# Altium PCB FS872.pcbdoc
Units mil, origin at the board's own origin, x right, y up, seen from the top; angles counter-clockwise.
Board outline 2380.96 x 2050 mil, 2 copper layers (Top Layer, Bottom Layer); 13 components, 21 nets, 84 pads, 43 vias.
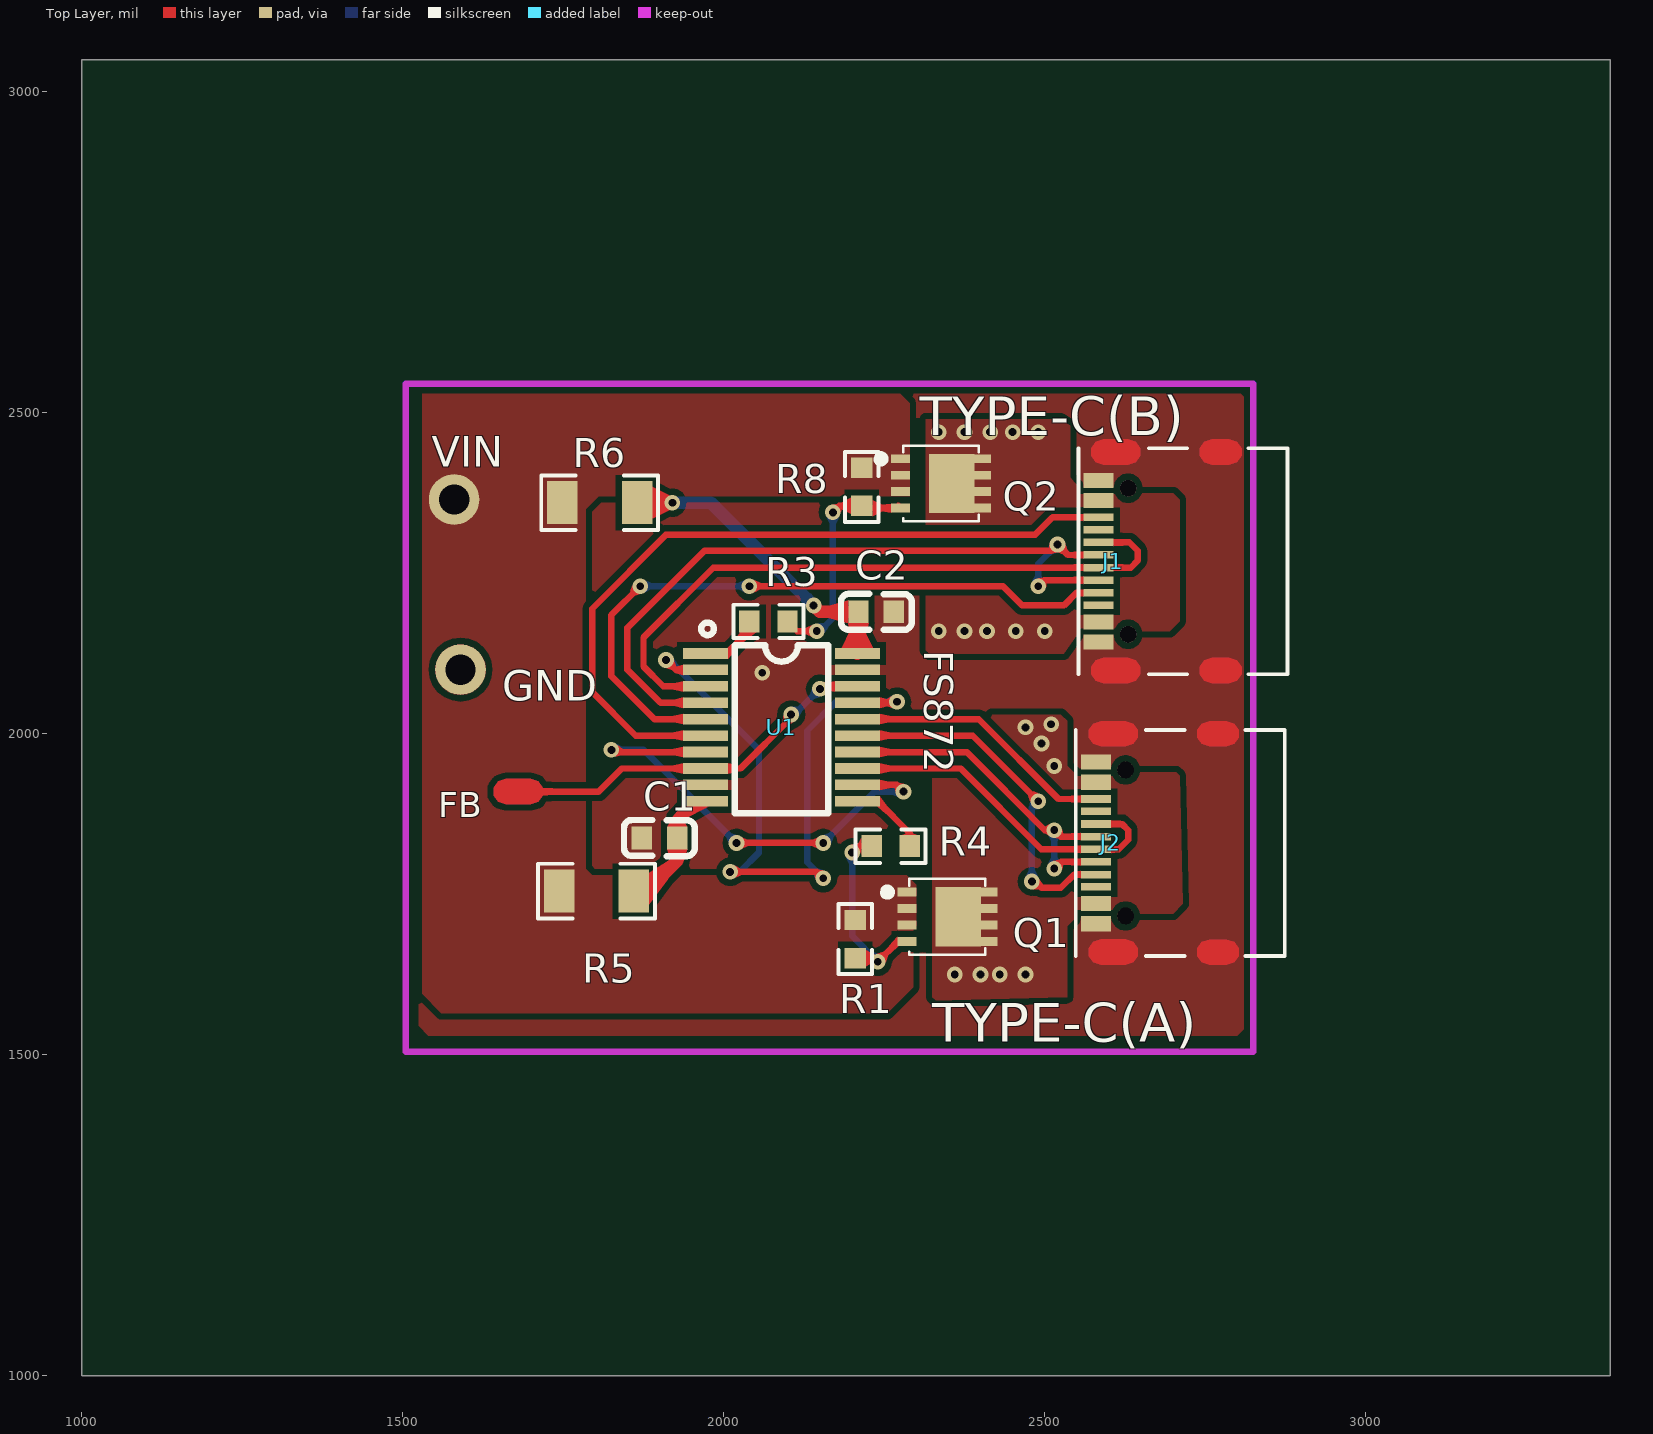
[diagram p0: Top Layer view]
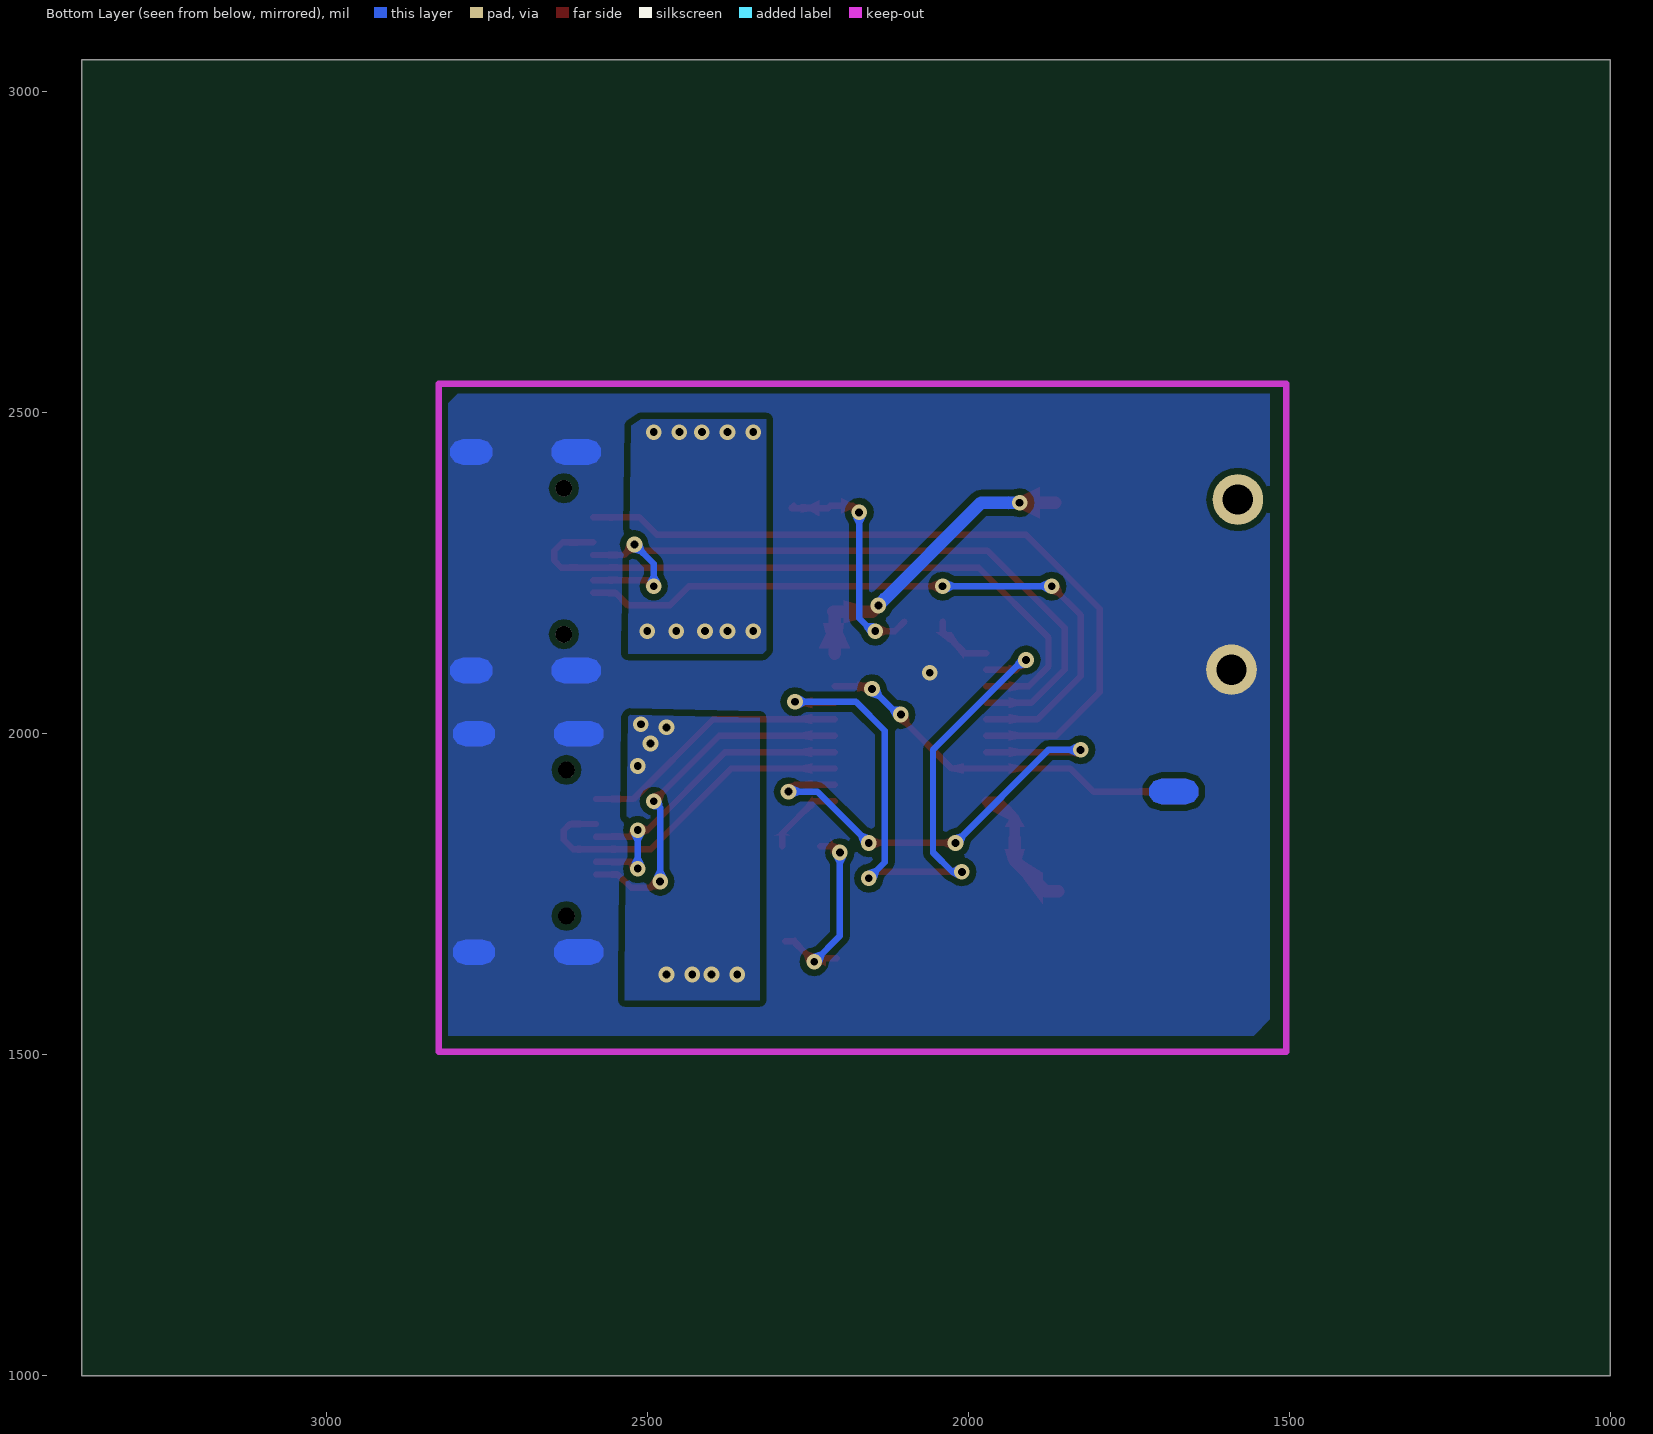
[diagram p1: Bottom Layer view, seen from below]

## Layer stack, top to bottom
Top Solder: solder mask 0.4, Solder Resist, Dk 3.5
Top Layer: signal copper 1.4
Dielectric1: dielectric 12.6, FR-4, Dk 4.8
Bottom Layer: signal copper 1.4
Bottom Solder: solder mask 0.4, Solder Resist, Dk 3.5

## Board outline
3380.96,1000 1000,1000 1000,3050 3380.96,3050

## Design rules (kind name [scope] priority, off if disabled: settings)
Clearance [All] p1: gap=10
PolygonConnect [All] p1: connectstyle=Direct reliefconductorwidth=10 reliefentries=4 polygonreliefangle="90 Angle" airgapwidth=10
RoutingVias [All] p1: holewidth=28 width=50 viastyle="Through Hole" minholewidth=28 minwidth=50 maxholewidth=28 maxwidth=50
SolderMaskExpansion [All] p1: expansion=4
Width [All] p1: maxlimit=10 minlimit=10 preferedwidth=10
30 further rules are at their usual default settings.

## Components (designator, comment, footprint, x,y, rotation, side; value= is the part's Value field where it differs from the comment)
C1 "0.1u" C0603 1900,1837.56 r0 top
C2 "0.1u" C0603 2237.44,2190 r180 top
J1 "TYPE-C(B)" TYPE-C 2679.01,2268.78 r0 top
J2 "TYPE-C(A)" TYPE-C 2675,1830 r0 top
Q1 "ZT2300" DFN3X3-8L 2348.44,1715.03 r0 top
Q2 "ZT2300" DFN3X3-8L 2338.44,2390.03 r0 top
R1 "47k" R0603 2205,1680.34 r90 top
R3 "7.5k" R0603 2069.66,2175 r0 top
R4 "7.5k" R0603 2260,1825 r180 top
R5 "1k" R1206 1801.78,1755 r180 top
R6 "1k" R1206 1806.78,2360 r180 top
R8 "47k" R0603 2215,2384.66 r90 top
U1 "FS872" ETSSOP20_L6.5-W4.4-P0.65-LS6.4-BL 2090,2010 r270 top

## Footprints (in the part's own frame and the unit in brackets; to place one, negate y for a bottom-side part, rotate by r counter-clockwise, add the part's x,y. Pads: shape width x height; smd on the part's side, far side on the other; paste and mask are expansions set on the pad)
C0603 [mm]
  rect 0.8x0.9 smd paste+0 mask+0.051: 1(-0.7,0) 2(0.7,0)
  silkscreen extent -1.41,-0.71 1.39,0.72
DFN3X3-8L [mm]
  rect 0.75x0.35 smd paste+0 mask+0.102: 1(-1.6,0.976) 2(-1.6,0.326) 3(-1.6,-0.324) 4(-1.6,-0.975) 5(1.599,-0.975) 6(1.599,-0.324) 7(1.599,0.326) 8(1.599,0.976)
  rect 1.8x2.35 smd paste+0 mask+0.102: 8(0.421,-0.001)
  silkscreen extent -2.53,-1.5 1.5,1.5
ETSSOP20_L6.5-W4.4-P0.65-LS6.4-BL [mm]
  rect 0.42x1.78 smd paste+0 mask+0.051: 1(-2.925,-3) 2(-2.275,-3) 3(-1.625,-3) 4(-0.975,-3) 5(-0.325,-3) 6(0.325,-3) 7(0.975,-3) 8(1.625,-3) 9(2.275,-3) 10(2.925,-3) 11(2.925,3) 12(2.275,3) 13(1.625,3) 14(0.975,3) 15(0.325,3) 16(-0.325,3) 17(-0.975,3) 18(-1.625,3) 19(-2.275,3) 20(-2.925,3)
  silkscreen extent -4.15,-3.17 3.4,1.85
R0603 [mil]
  rect 31.75x34.02 smd paste-3937.01 mask+2: 1(-29.65,0) 2(29.65,0)
  silkscreen extent -55,-26 55,26
R1206 [mil]
  rect 47.54x66.97 smd paste-3937.01 mask+2: 1(-58.22,0) 2(58.22,0)
  silkscreen extent -91,-42 91,42
TYPE-C [mm]
  rect 1.2x0.3 smd paste+0 mask+0.051: A5(-2.415,-1.25) A6(-2.415,-0.25) A7(-2.415,0.25) A8(-2.415,1.25) B5(-2.415,1.74) B6(-2.415,0.75) B7(-2.415,-0.75) B8(-2.415,-1.74)
  rect 1.2x0.6 smd paste+0 mask+0.051: B1/A12(-2.415,3.2) B4/A9(-2.415,2.4) B9/A4(-2.415,-2.4) B12/A1(-2.415,-3.2)
  round 0.65 hole 0.65 slot 0.655 at 90 deg unplated paste+0 mask+0.051: ""(-1.245,-2.89) ""(-1.245,2.89)
  Top Layer region: 2.765,3.82 3.059,3.915 3.24,4.165 3.24,4.474 3.059,4.724 2.765,4.82 2.065,4.82 1.771,4.724 1.589,4.474 1.589,4.165 1.771,3.915 2.065,3.82
  Top Layer region: 2.765,-4.82 3.059,-4.725 3.241,-4.475 3.241,-4.166 3.059,-3.916 2.765,-3.82 2.065,-3.82 1.771,-3.916 1.589,-4.166 1.589,-4.475 1.771,-4.725 2.065,-4.82
  Top Layer region: -1.235,3.82 -0.941,3.916 -0.76,4.166 -0.76,4.475 -0.941,4.725 -1.235,4.82 -2.235,4.82 -2.529,4.725 -2.711,4.475 -2.711,4.166 -2.529,3.916 -2.235,3.82
  Top Layer region: -1.235,-4.82 -0.941,-4.724 -0.76,-4.474 -0.76,-4.165 -0.941,-3.915 -1.235,-3.82 -2.235,-3.82 -2.529,-3.915 -2.711,-4.165 -2.711,-4.474 -2.529,-4.724 -2.235,-4.82
  Bottom Layer region: 2.765,3.82 3.059,3.915 3.24,4.165 3.24,4.474 3.059,4.724 2.765,4.82 2.065,4.82 1.771,4.724 1.589,4.474 1.589,4.165 1.771,3.915 2.065,3.82
  Bottom Layer region: 2.765,-4.82 3.059,-4.725 3.241,-4.475 3.241,-4.166 3.059,-3.916 2.765,-3.82 2.065,-3.82 1.771,-3.916 1.589,-4.166 1.589,-4.475 1.771,-4.725 2.065,-4.82
  Bottom Layer region: -1.235,3.82 -0.941,3.916 -0.76,4.166 -0.76,4.475 -0.941,4.725 -1.235,4.82 -2.235,4.82 -2.529,4.725 -2.711,4.475 -2.711,4.166 -2.529,3.916 -2.235,3.82
  Bottom Layer region: -1.235,-4.82 -0.941,-4.724 -0.76,-4.474 -0.76,-4.165 -0.941,-3.915 -1.235,-3.82 -2.235,-3.82 -2.529,-3.915 -2.711,-4.165 -2.711,-4.474 -2.529,-4.724 -2.235,-4.82
  Multi-Layer region: 2.765,3.82 3.059,3.915 3.24,4.165 3.24,4.474 3.059,4.724 2.765,4.82 2.065,4.82 1.771,4.724 1.589,4.474 1.589,4.165 1.771,3.915 2.065,3.82
  Multi-Layer region: 2.765,-4.82 3.059,-4.725 3.241,-4.475 3.241,-4.166 3.059,-3.916 2.765,-3.82 2.065,-3.82 1.771,-3.916 1.589,-4.166 1.589,-4.475 1.771,-4.725 2.065,-4.82
  Multi-Layer region: -1.235,3.82 -0.941,3.916 -0.76,4.166 -0.76,4.475 -0.941,4.725 -1.235,4.82 -2.235,4.82 -2.529,4.725 -2.711,4.475 -2.711,4.166 -2.529,3.916 -2.235,3.82
  Multi-Layer region: -1.235,-4.82 -0.941,-4.724 -0.76,-4.474 -0.76,-4.165 -0.941,-3.915 -1.235,-3.82 -2.235,-3.82 -2.529,-3.915 -2.711,-4.165 -2.711,-4.474 -2.529,-4.724 -2.235,-4.82
  silkscreen extent -3.22,-4.47 5.05,4.47

## Free pads (board coordinates)
  round 78.74 hole 47.24 paste+0 mask+2: 1(1580,2365) 1(1590,2100)

## Via types
v1: diameter 24.41, hole 12.2, Top Layer to Bottom Layer, tented both sides, 43 vias

## Nets (pads, with @x,y where several pads share a name; then routed paths per layer and width w, separated by ;. In a path a pad name is that pad's centre, name@x,y a point inside that pad or via, vN(x,y) a via of type N, cw(c..) or ccw(c..) an arc to the next point about the centre after c; other vN are vias at no path point)
CC1A: J2.A5 U1.15 | length 566
  Top Layer w10: U1.15 2387.8,1997.2 v1(2490,1895) ; v1(2480,1770) 2485,1770 2495,1760 2525,1760 2545.8,1780.8 J2.A5
  Bottom Layer w10: v1(2480,1770) 2480,1885 v1(2490,1895)
CC1B: J1.A5 U1.5 | length 1067.8
  Top Layer w10: v1(1870,2230) 1825,2185 1825,2090 1892.2,2022.8 U1.5 ; v1(2040,2230) 2435,2230 2465,2200 2530,2200 2549.6,2219.6 J1.A5
  Bottom Layer w10: v1(1870,2230) v1(2040,2230)
CC2A: J2.B5 U1.16 | length 423.3
  Top Layer w10: U1.16 2397.2,2022.8 2521.5,1898.5 J2.B5
CC2B: J1.B5 U1.6 | length 1182.8
  Top Layer w10: U1.6 1862.8,1997.2 1795,2065 1795,2195 1910,2310 2485,2310 2512.3,2337.3 J1.B5
DMA: J2.A7 J2.B7 U1.14 | length 555.6
  Top Layer w10: U1.14 2378.4,1971.6 2500,1850 v1(2515,1850) 2525.2,1839.8 J2.A7 ; v1(2515,1790) 2525.5,1800.5 J2.B7
  Bottom Layer w10: v1(2515,1790) v1(2515,1850)
DMB: J1.A7 J1.B7 U1.4 | length 1178
  Top Layer w10: U1.4 1901.6,2048.4 1850,2100 1850,2165 1970,2285 2510,2285 v1(2520,2295) 2536.4,2278.6 J1.A7 ; v1(2490,2230) 2499.2,2239.3 J1.B7@2583.9,2239.3
  Bottom Layer w10: v1(2490,2230) 2490,2265 v1(2520,2295)
DPA: J2.A6 J2.B6 U1.13 | length 549.2
  Top Layer w10: U1.13 2369,1946 2494.8,1820.2 J2.A6 2615.2,1820.2 2630,1835 2630,1850 2620.5,1859.5 J2.B6
DPB: J1.A6 J1.B6 U1.3 | length 1056.1
  Top Layer w10: U1.3 1906,2074 1875,2105 1875,2150 1983.9,2258.9 J1.A6 2633.9,2258.9 2645,2270 2645,2285 2631.7,2298.3 J1.B6
FB: U1.8 U1.18 | length 601.3
  Top Layer w10: 1680,1910 1805,1910 1841,1946 U1.8 2026,1946 2105,2025 v1(2105,2030) ; v1(2150,2070) 2150,2074 U1.18
  Bottom Layer w10: v1(2105,2030) 2110,2030 v1(2150,2070)
GND: C1.1 C2.1 J1.B1/A12 J1.B12/A1 J2.B1/A12 J2.B12/A1 pad.1@1590,2100 U1.9 U1.19
  other v1: 2060,2095
Q1_5: J2.B4/A9 J2.B9/A4 Q1.5 Q1.6 Q1.7 Q1.8
  other v1: 2360,1625 2400,1625 2430,1625 2470,1625 2515,1950 2495,1985 2470,2010 2510,2015
Q2_4: Q2.4 R3.2 R8.1 | length 365.8
  Top Layer w10: R3.2 2114.3,2160 v1(2145,2160) ; v1(2170,2345) 2180,2355 R8.1 2218.3,2351.7 2275.4,2351.7 Q2.4@2272.1,2355
  Bottom Layer w10: v1(2145,2160) 2150,2160 2170,2180 v1(2170,2345)
Q2_5: J1.B4/A9 J1.B9/A4 Q2.5 Q2.6 Q2.7 Q2.8
  other v1: 2335,2160 2375,2160 2410,2160 2455,2160 2500,2160 2335,2470 2375,2470 2415,2470 2450,2470 2490,2470
R1_1: Q1.4 R1.1 R4.2 | length 316.9
  Top Layer w10: v1(2200,1815) 2210,1825 R4.2 ; R1.1 2234.3,1650.7 v1(2240,1645) 2271.7,1676.7 Q1.4@2285.4,1676.7
  Bottom Layer w10: v1(2200,1815) 2200,1685 v1(2240,1645)
U1_1: R3.1 U1.1 | length 97.5
  Top Layer w10: U1.1 2005.2,2125.2 2040,2160 R3.1
U1_2: U1.2 U1.17 | length 1099.4
  Top Layer w10: v1(1910,2115) 1925.4,2099.6 U1.2 ; v1(2010,1785) 2145,1785 v1(2155,1775) ; U1.17 2268.4,2048.4 v1(2270,2050)
  Bottom Layer w10: v1(1910,2115) 1915,2115 2055,1975 2055,1815 2025,1785 v1(2010,1785) ; v1(2155,1775) 2130,1800 2130,2005 2175,2050 v1(2270,2050)
U1_7: U1.7 U1.12 | length 772.7
  Top Layer w10: v1(1825,1975) 1828.4,1971.6 U1.7 ; v1(2020,1830) v1(2155,1830) ; U1.12 2269.6,1920.4 v1(2280,1910)
  Bottom Layer w10: v1(1825,1975) 1875,1975 v1(2020,1830) ; v1(2155,1830) 2235,1910 v1(2280,1910)
U1_10: C1.2 R5.1 U1.10 | length 207.9
  Top Layer w15.75: C1.2 1927.6,1867.6 1954.8,1894.8 U1.10
  Top Layer w19.68: R5.1 1880,1755 1927.6,1802.6 C1.2
U1_11: R4.1 U1.11 | length 122.4
  Top Layer w10: U1.11 2240.2,1894.8 2289.7,1845.3 R4.1
U1_20: C2.2 R6.1 U1.20 | length 546.4
  Top Layer w10: U1.20 2208.1,2188.2 C2.2
  Top Layer w19.68: R6.1 v1(1920,2360) ; v1(2140,2200) 2150,2190 C2.2 2208.1,2188.2 U1.20
  Bottom Layer w19.68: v1(1920,2360) 1980,2360 v1(2140,2200)
VIN: pad.1@1580,2365 Q1.1 Q1.2 Q1.3 Q2.1 Q2.2 Q2.3 R1.2 R5.2 R6.2 R8.2
pads on no net: J1. J1.A8 J1.B8 J2. J2.A8 J2.B8

## Polygon pours and split planes (outlines as drawn)
Q2_5 on Bottom Layer "Bottom Layer-Q2_5" (solid, pour order 0): 2315,2490 2315,2165 2315,2130 2320,2125 2515,2125 2530,2125 2530,2160 2525,2480 2510,2490 2385,2490
Q1_5 on Bottom Layer "Bottom Layer-Q1_5" (solid, pour order 2): 2325,2025 2325,1585 2375,1585 2515,1585 2535,1585 2535,1625 2530,2030
GND on Bottom Layer "Bottom Layer-GND" (solid, pour order 4): 1530,2530 1530,1555 1555,1530 2815,1530 2815,2510 2795,2530
Q2_5 on Top Layer "Top Layer-Q2_5" (solid, pour order 6): 2315,2350 2315,2490 2375,2490 2510,2490 2525,2490 2540,2480 2540,2400 2560,2375 2700,2375 2710,2365 2710,2175 2695,2160 2555,2160 2530,2125 2320,2125 2315,2130 2315,2165
Q1_5 on Top Layer "Top Layer-Q1_5" (solid, pour order 8): 2325,1665 2325,1590 2330,1585 2355,1585 2535,1590 2535,1700 2555,1720 2700,1720 2715,1735 2710,1935 2705,1940 2545,1940 2535,1950 2535,2020 2525,2030 2335,2030 2325,2020
VIN on Top Layer "Top Layer-VIN" (solid, pour order 10): 1530,2150 1530,2535 2270,2535 2290,2515 2290,2370 1805,2370 1785,2350 1785,1790 1795,1780 2285,1780 2300,1765 2300,1700 2295,1695 2295,1605 2255,1565 1560,1565 1530,1595
GND on Top Layer "Top Layer-GND" (solid, pour order 12): 1530,2535 2800,2535 2815,2520 2815,1545 2800,1530 1540,1530 1525,1545

## Keep-outs
Keep-Out Layer:
  lines w10: 1505,1505 2825,1505 2825,2545 1505,2545 1505,2175 1505,1505

## Other copper
Top Layer:
  region net DMB: 2502.18,2229.3 2489.17,2242.18 2495.64,2242.82 2502.75,2235.78
  region net DMB: 2520.76,2282.82 2507.82,2295.76 2506.46,2288.54 2513.54,2281.46
  region net DMB: 2532.18,2295.77 2519.24,2282.82 2528.22,2279.72 2535.29,2286.79
  region net DMA: 2506.93,1840.85 2506.93,1859.15 2500,1855 2500,1845
  region net DMA: 2527.18,1850.76 2514.24,1837.82 2521.66,1836.26 2528.74,1843.34
  region net DMA: 2527.18,1789.24 2514.23,1802.18 2521.96,1804.04 2529.03,1796.97
  region net CC1A: 2490.76,1907.18 2477.82,1894.24 2474.71,1903.21 2481.79,1910.29
  region net CC1A: 2491.74,1773.34 2481.84,1757.94 2491.21,1756.71 2496.75,1765.33
  region net CC1B: 1870.76,2217.82 1857.82,2230.76 1854.71,2221.79 1861.79,2214.71
  region net CC1B: 2048.07,2220.85 2048.07,2239.15 2056.62,2235 2056.62,2225
  region net U1_2: 1922.18,2115.76 1909.24,2102.82 1918.21,2099.71 1925.29,2106.79
  region net U1_20: 1911.93,2350.85 1911.93,2369.15 1903.38,2369.84 1903.38,2350.16
  region net U1_20: 2152.18,2200.76 2139.24,2187.82 2143.04,2183.04 2156.96,2196.96
  region net Q2_4: 2136.93,2150.85 2136.93,2169.15 2128.38,2165 2128.38,2155
  region net Q2_4: 2182.18,2344.24 2169.24,2357.18 2176.46,2358.54 2183.54,2351.46
  region net U1_7: 1834.78,1982.31 1831.03,1964.39 1840.22,1966.6 1842.31,1976.6
  region net U1_7: 2028.07,1820.85 2028.07,1839.15 2036.62,1835 2036.62,1825
  region net U1_7: 2146.93,1820.85 2146.93,1839.15 2138.38,1835 2138.38,1825
  region net U1_7: 2280.76,1922.18 2267.82,1909.24 2266.06,1916.86 2273.14,1923.94
  region net U1_2: 2018.07,1775.85 2018.07,1794.15 2026.62,1790 2026.62,1780
  region net U1_2: 2155.76,1787.18 2142.82,1774.24 2141.46,1781.46 2148.54,1788.54
  region net U1_2: 2262.85,2040.11 2261.08,2058.33 2252.98,2053.39 2253.95,2043.39
  region net R1_1: 2252.18,1644.24 2239.24,1657.18 2248.21,1660.29 2255.29,1653.21
  region net R1_1: 2235.56,1656.37 2229.28,1639.17 2222.57,1645.7 2226.22,1655.7
  region net R1_1: 2212.18,1814.24 2199.24,1827.18 2206.46,1828.54 2213.54,1821.46
  region net FB: 2160.04,2063.06 2155.63,2080.83 2164.89,2079 2167.37,2069
  region net FB: 2092.94,2028.15 2108.34,2018.26 2100.32,2013.25 2091.71,2018.79
  region net R1_1: 2214.47,1812.5 2214.47,1837.5 2210,1830 2210,1820
  region net U1_11: 2302.2,1842.01 2277.2,1842.01 2284.7,1845.3 2294.7,1845.3
  region net U1_10: 1943.31,1819.84 1911.81,1819.84 1917.76,1802.6 1937.44,1802.6
  region net U1_10: 1911.81,1855.28 1943.31,1855.28 1935.47,1867.6 1919.73,1867.6
  region net U1_20: 2225.63,2172.28 2194.13,2172.28 2198.26,2142.76 2217.94,2142.76
  region net U1_20: 2194.13,2172.28 2194.13,2207.72 2164.6,2199.84 2164.6,2180.16
  region net U1_20: 2220.6,2172.28 2195.6,2172.28 2203.1,2157.28 2213.1,2157.28
  region net R1_1: 2272.9,1669.75 2270.65,1683.55 2257.7,1669.77 2259.68,1657.61
  region net Q2_4: 2260.65,2344.75 2260.65,2358.55 2245.65,2356.7 2245.65,2346.7
  region net R1_1: 2222.01,1638.2 2222.01,1663.2 2234.3,1655.7 2234.3,1645.7
  region net U1_1: 2025.49,2157.99 2050.49,2157.99 2030.06,2142.99 2015.92,2142.99
  region net Q2_4: 2232.01,2339.2 2232.01,2364.2 2247.01,2356.7 2247.01,2346.7
  region net Q2_4: 2197.99,2367.5 2197.99,2342.5 2182.99,2350 2182.99,2360
  region net U1_10: 1883.8,1734.19 1883.8,1783.41 1913.33,1802.25 1913.33,1774.41
  region net U1_20: 1888.77,2335.39 1888.77,2384.61 1918.3,2369.84 1918.3,2350.16
  region net U1_1: 2005.87,2133.43 2006.93,2116.89 2020.88,2133.81 2020.03,2147.1
  region net U1_2: 1936.85,2091.3 1936.85,2107.83 1925.4,2104.6 1925.4,2094.6
  region net DPB: 1936.85,2065.71 1936.85,2082.24 1921.85,2079 1921.85,2069
  region net DMB: 1936.85,2040.12 1936.85,2056.65 1921.85,2053.4 1921.85,2043.4
  region net CC1B: 1936.85,2014.53 1936.85,2031.06 1921.85,2027.8 1921.85,2017.8
  region net CC2B: 1936.85,1988.94 1936.85,2005.47 1921.85,2002.2 1921.85,1992.2
  region net U1_7: 1936.85,1963.35 1936.85,1979.88 1921.85,1976.6 1921.85,1966.6
  region net FB: 2006.93,1954.29 2006.93,1937.76 2021.93,1941 2021.93,1951
  region net FB: 1936.85,1937.76 1936.85,1954.29 1921.85,1951 1921.85,1941
  region net U1_10: 1976.13,1886.57 1936.85,1889.23 1922.03,1873.17 1938.03,1866.89
  region net U1_11: 2243.15,1903.11 2239.55,1886.57 2252.48,1875.45 2255.01,1887.06
  region net U1_7: 2243.15,1928.7 2243.15,1912.17 2258.15,1915.4 2258.15,1925.4
  region net DPA: 2243.15,1954.29 2243.15,1937.76 2258.15,1941 2258.15,1951
  region net DMA: 2243.15,1979.88 2243.15,1963.35 2258.15,1966.6 2258.15,1976.6
  region net CC1A: 2243.15,2005.47 2243.15,1988.94 2258.15,1992.2 2258.15,2002.2
  region net CC2A: 2243.15,2031.06 2243.15,2014.53 2258.15,2017.8 2258.15,2027.8
  region net U1_2: 2243.15,2056.65 2243.15,2040.12 2258.15,2043.39 2258.15,2053.39
  region net FB: 2173.07,2065.71 2173.07,2082.24 2158.07,2079 2158.07,2069
  region net U1_20: 2183.49,2133.43 2232.71,2133.43 2217.94,2162.95 2198.26,2162.95
  region net U1_20: 2195.6,2133.43 2220.6,2133.43 2213.1,2148.43 2203.1,2148.43
  region net CC2B: 2560.31,2343.19 2560.31,2331.38 2545.31,2332.3 2545.31,2342.3
  region net DPB: 2607.55,2292.4 2607.55,2304.21 2622.55,2303.3 2622.55,2293.3
  region net DMB: 2560.31,2284.52 2560.31,2272.71 2545.31,2273.6 2545.31,2283.6
  region net DPB: 2560.31,2264.84 2560.31,2253.03 2545.31,2253.9 2545.31,2263.9
  region net DPB: 2607.55,2253.03 2607.55,2264.84 2622.55,2263.9 2622.55,2253.9
  region net DMB: 2560.31,2245.15 2560.31,2233.34 2545.31,2234.3 2545.31,2244.3
  region net CC1B: 2560.31,2225.47 2560.31,2213.66 2549.6,2214.6 2549.6,2224.6
  region net CC2A: 2556.29,1904.41 2556.29,1892.6 2541.29,1893.5 2541.29,1903.5
  region net DPA: 2603.54,1853.62 2603.54,1865.43 2618.54,1864.5 2618.54,1854.5
  region net DMA: 2556.29,1845.74 2556.29,1833.93 2541.29,1834.8 2541.29,1844.8
  region net DPA: 2556.29,1826.06 2556.29,1814.25 2541.29,1815.2 2541.29,1825.2
  region net DPA: 2603.54,1814.25 2603.54,1826.06 2615.2,1825.2 2615.2,1815.2
  region net DMA: 2556.29,1806.37 2556.29,1794.56 2541.29,1795.5 2541.29,1805.5
  region net CC1A: 2556.29,1786.69 2556.29,1774.88 2545.8,1775.8 2545.8,1785.8
  region net FB: 1718.41,1903.91 1718.41,1916.08 1733.41,1915 1733.41,1905
  region net FB: 1699.69,1890.31 1711.26,1894.07 1718.41,1903.91 1718.41,1916.08 1711.26,1925.92 1699.69,1929.68 1660.32,1929.68 1648.75,1925.92 1641.6,1916.08 1641.6,1903.91 1648.75,1894.07 1660.32,1890.31
Bottom Layer:
  region net DMB: 2480.85,2238.07 2499.15,2238.07 2495,2246.62 2485,2246.62
  region net DMB: 2520.76,2282.82 2507.82,2295.76 2504.71,2286.79 2511.79,2279.71
  region net DMA: 2505.85,1841.93 2524.15,1841.93 2520,1833.38 2510,1833.38
  region net DMA: 2505.85,1798.07 2524.15,1798.07 2520,1806.62 2510,1806.62
  region net CC1A: 2490.76,1882.82 2477.82,1895.76 2476.46,1888.54 2483.54,1881.46
  region net CC1A: 2470.85,1778.07 2489.15,1778.07 2485,1786.62 2475,1786.62
  region net CC1B: 1878.07,2220.85 1878.07,2239.15 1886.62,2235 1886.62,2225
  region net CC1B: 2031.93,2220.85 2031.93,2239.15 2023.38,2235 2023.38,2225
  region net U1_2: 1921.74,2118.34 1911.85,2102.94 1921.21,2101.71 1926.75,2110.32
  region net U1_20: 1928.07,2350.85 1928.07,2369.15 1936.62,2369.84 1936.62,2350.16
  region net U1_20: 2140.76,2212.18 2127.82,2199.24 2121.29,2204.79 2135.21,2218.71
  region net Q2_4: 2156.74,2156.66 2146.84,2172.06 2156.21,2173.29 2161.75,2164.68
  region net Q2_4: 2160.85,2336.93 2179.15,2336.93 2175,2328.38 2165,2328.38
  region net U1_7: 1833.07,1965.85 1833.07,1984.15 1841.62,1980 1841.62,1970
  region net U1_7: 2020.76,1842.18 2007.82,1829.24 2004.71,1838.21 2011.79,1845.29
  region net U1_7: 2167.18,1829.24 2154.24,1842.18 2163.21,1845.29 2170.29,1838.21
  region net U1_7: 2271.93,1900.85 2271.93,1919.15 2263.38,1915 2263.38,1905
  region net U1_2: 2018.07,1775.85 2018.07,1794.15 2025,1790 2025,1780
  region net U1_2: 2155.76,1787.18 2142.82,1774.24 2139.71,1783.21 2146.79,1790.29
  region net U1_2: 2261.93,2040.85 2261.93,2059.15 2253.38,2055 2253.38,2045
  region net R1_1: 2240.76,1657.18 2227.82,1644.24 2224.71,1653.21 2231.79,1660.29
  region net R1_1: 2190.85,1806.93 2209.15,1806.93 2205,1798.38 2195,1798.38
  region net FB: 2150.76,2057.82 2137.82,2070.76 2134.71,2061.79 2141.79,2054.71
  region net FB: 2116.74,2026.66 2106.84,2042.06 2116.21,2043.29 2121.75,2034.67
  region net FB: 1699.69,1890.31 1711.26,1894.07 1718.41,1903.91 1718.41,1916.08 1711.26,1925.92 1699.69,1929.68 1660.32,1929.68 1648.75,1925.92 1641.6,1916.08 1641.6,1903.91 1648.75,1894.07 1660.32,1890.31
Multi-Layer:
  region net FB: 1699.69,1890.31 1711.26,1894.07 1718.41,1903.91 1718.41,1916.08 1711.26,1925.92 1699.69,1929.68 1660.32,1929.68 1648.75,1925.92 1641.6,1916.08 1641.6,1903.91 1648.75,1894.07 1660.32,1890.31

## Silkscreen, mask and mechanical layers (free items; w line width, h text height)
Top Overlay:
  text "VIN" at 1545,2416.38 h47.24
  text "GND" at 1655,2051.38 h47.24
  text "FB" at 1555,1870.32 h39.37
Document:
  lines w0.1: 2190.47,2024.99 2190.49,2025.01